# EAGLE board ATmegaProgramming (EAGLE 6.2)
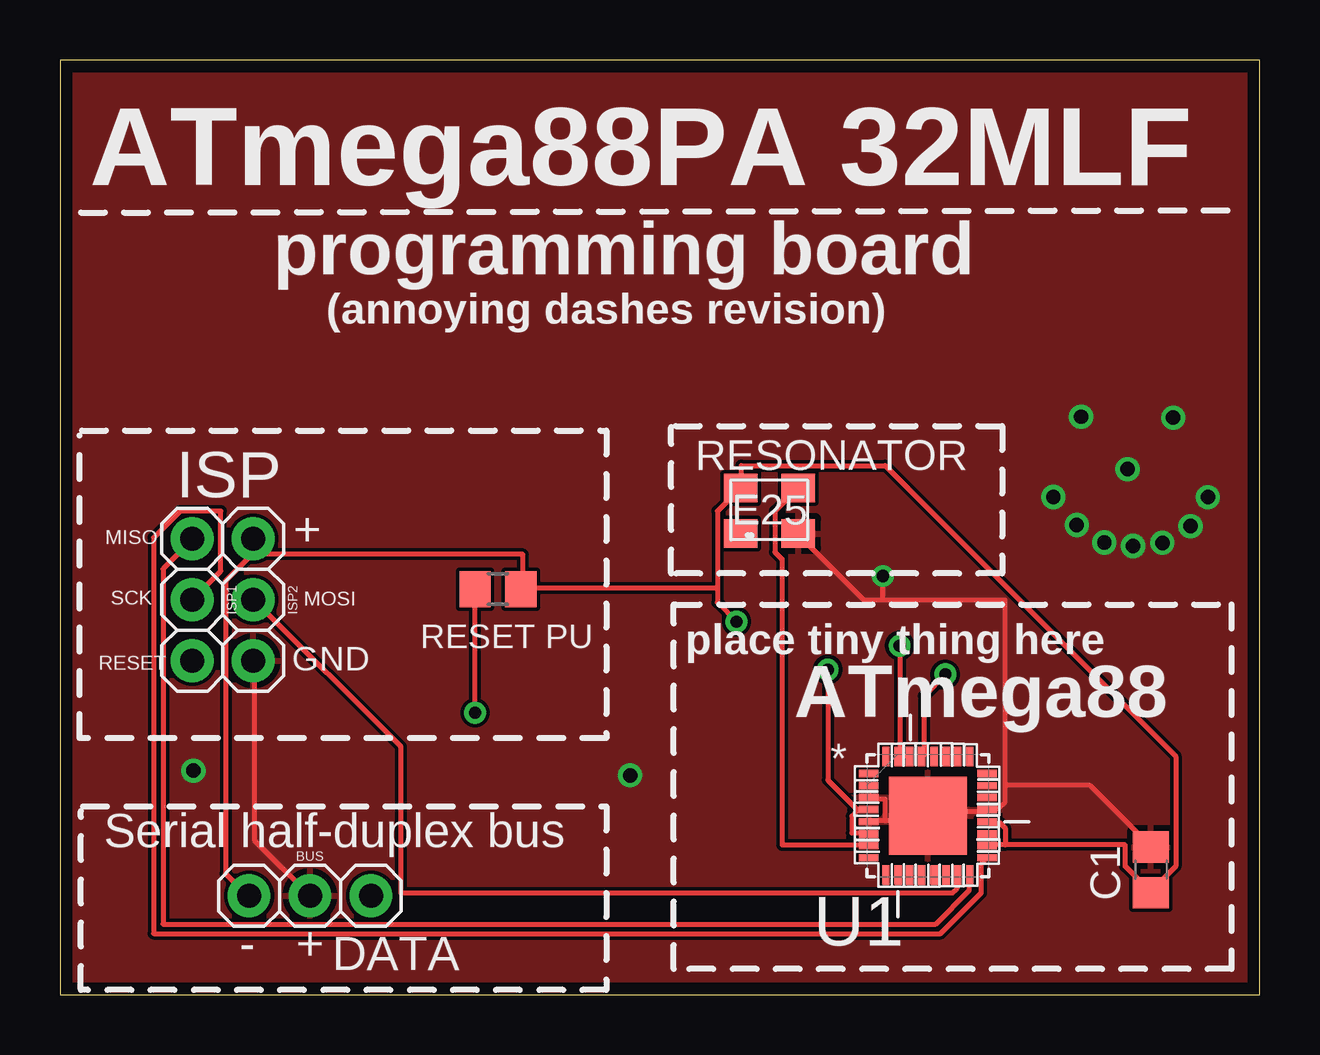
[diagram p0: board, top side]
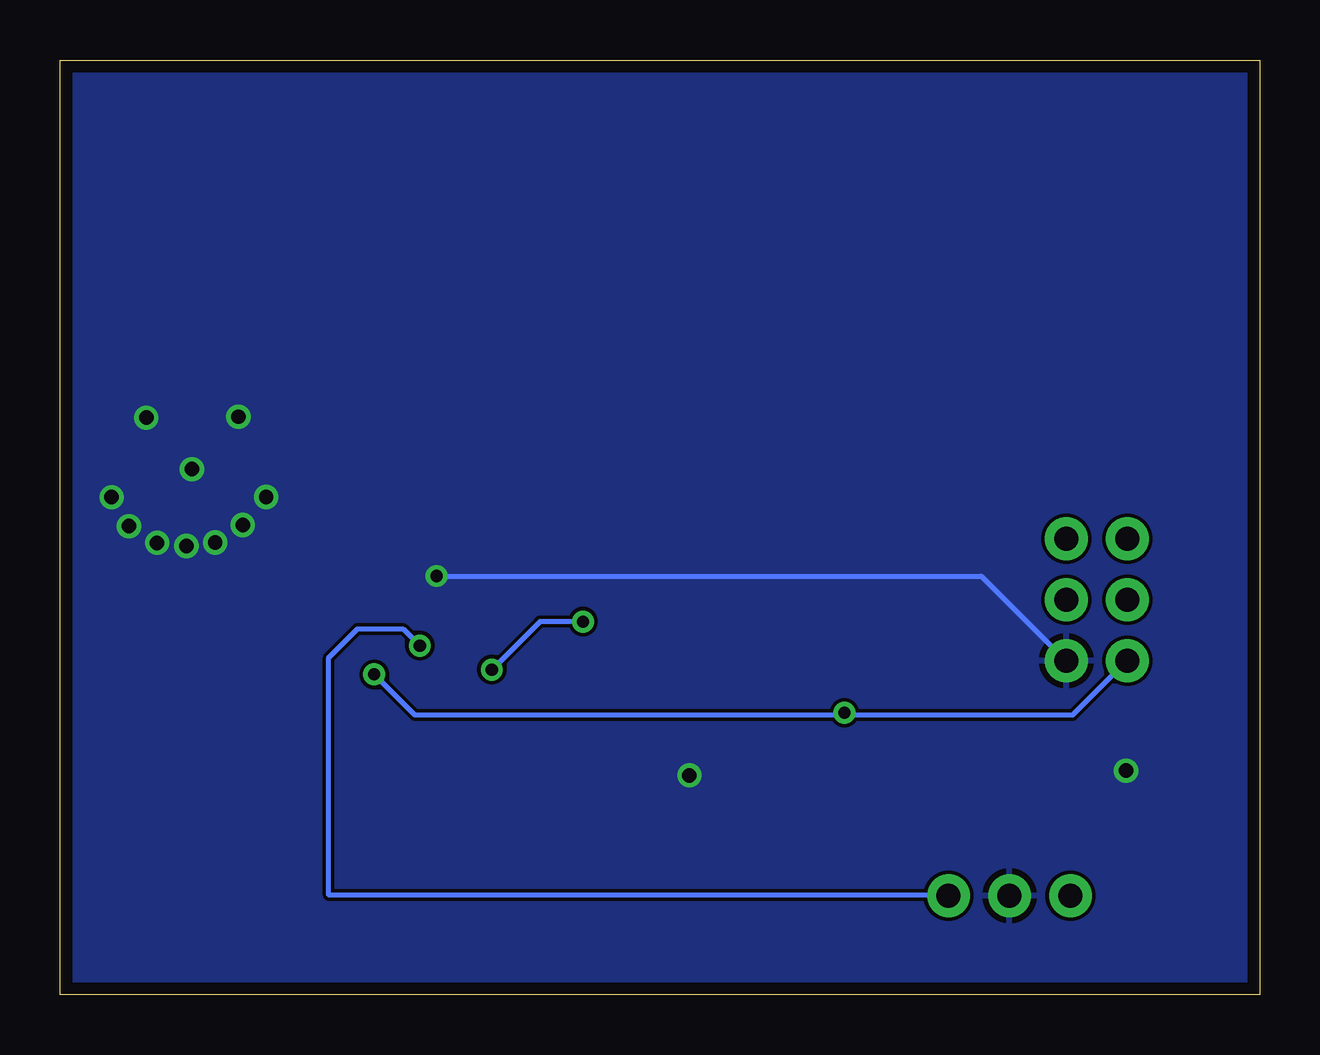
[diagram p1: board, bottom side, seen from below]

Size 50 x 38.94 mm. Coordinates in mm from the lower left corner, seen from the top.
Outline: 0,0 50,0 50,38.94 0,38.94 0,0
Copper layers (1*16): Top 0.035mm / dielectric 1.5mm / Bottom 0.035mm
Design rules: minimum track width 8mil, minimum drill 20mil, track to track 6mil, track to pad 6mil, pad to pad 6mil, via to via 50mil, smd to smd 6mil, copper to edge 20mil, drill to drill 5mil, minimum pad ring 10mil, minimum via ring 8mil, stop-mask expansion 4mil, vias tented up to drill 0mil, thermal gap 10mil

## Footprints (pad centres in the part's own frame; a part is rotated, then mirrored left to right if it is on the bottom)
CONNEC_1X03 = drill 1 pad 1.778: 1 -1.27,1.27; 2 1.27,1.27; 3 3.81,1.27
C0805 = smd 1.3 x 1.5: 1 -0.95,0; 2 0.95,0
R0805 = smd 1.3 x 1.5: 1 -0.95,0; 2 0.95,0
SG-310 = smd 1.4 x 1.2: 1 0,0; 2 2.4,0; 3 2.4,1.9; 4 0,1.9
QFN50P500X500X100-33N = smd 0.813 x 0.305: 1 -2.464,1.753; 2 -2.464,1.245; 3 -2.464,0.762; 4 -2.464,0.254; 5 -2.464,-0.254; 6 -2.464,-0.762; 7 -2.464,-1.245; 8 -2.464,-1.753; 17 2.464,-1.753; 18 2.464,-1.245; 19 2.464,-0.762; 20 2.464,-0.254; 21 2.464,0.254; 22 2.464,0.762; 23 2.464,1.245; 24 2.464,1.753 | smd 0.305 x 0.813: 9 -1.753,-2.464; 10 -1.245,-2.464; 11 -0.762,-2.464; 12 -0.254,-2.464; 13 0.254,-2.464; 14 0.762,-2.464; 15 1.245,-2.464; 16 1.753,-2.464; 25 1.753,2.464; 26 1.245,2.464; 27 0.762,2.464; 28 0.254,2.464; 29 -0.254,2.464; 30 -0.762,2.464; 31 -1.245,2.464; 32 -1.753,2.464 | smd 3.251 x 3.251: 33 0,0

## Placement (x,y rotation side)
BUS  CONNEC_1X03  [CONNEC_1X03]  9.15,2.84 0 top
C1  100nF  [C0805]  45.48,5.2 90 top
ISP1  CONNEC_1X03  [CONNEC_1X03]  4.24,17.72 270 top
ISP2  CONNEC_1X03  [CONNEC_1X03]  6.78,17.72 270 top
R1  [R0805]  18.26,16.89 0 top
RESONATOR  SG-310  [SG-310]  28.38,19.21 0 top
U1  [QFN50P500X500X100-33N]  36.18,7.45 0 top

## Library data of the parts
BUS ISP1 ISP2 RESONATOR = RobotCampus
C1 = rhoban; DATASHEET: condo100nF.pdf; FARNELL_LINK: http://fr.farnell.com/kemet/c0805c104j5ractu/condensateur-100nf-50v-x7r-0805/dp/1414663RL
R1 = rhoban
U1 = RobotCampus; MPN: ATMEGA88PA-MU; OC_FARNELL: 1715491; OC_NEWARK: 15R0272; PACKAGE: QFN-32; SUPPLIER: Atmel

## Nets
CLOCK: RESONATOR.3 U1.7
DATA: BUS.3 U1.30 U1.31
GND: BUS.2 C1.2 ISP2.3 RESONATOR.2 U1.3 U1.5 U1.21 U1.33
MISO: ISP1.1 U1.16
MOSI: ISP2.2 U1.15
MOTORPOS: U1.23
RESET: ISP1.3 R1.1 U1.29
SCK: ISP1.2 U1.17
VCC: BUS.1 C1.1 ISP2.1 R1.2 RESONATOR.4 U1.4 U1.6 U1.18 U1.20

## Tracks (layer width: path | path; a pad name or v marks a point on that pad's centre or on a via)
CLOCK
  Top 0.203: U1.7 33.7,6.24 30.1,6.24 30.1,18.14 29.8,18.44 29.8,20.14 30.7,21.04 RESONATOR.3
DATA  (via drill 0.51)
  Top 0.203: U1.30 35.4,9.94 35,9.94 U1.31 35,10.04 v35,14.54
  Bottom 0.203: v35,14.54 35.7,15.24 37.6,15.24 38.8,14.04 38.8,4.14 13,4.14 BUS.3
GND  (via drill 0.51, 0.6)
  Top 0.203: BUS.2 10.4,4.14 8.1,6.44 8.1,13.84 ISP2.3 | 34.4,7.24 36.1,7.24 36.1,7.44 U1.33 36.2,7.54 36.2,7.64 38.6,7.64 U1.21 38.7,7.74 39.1,7.74 39.4,8.04 39.4,8.74 | 34.4,7.24 33.8,7.24 U1.5 | 34.4,7.24 34.4,8.14 33.8,8.14 U1.3 | 34.3,16.44 39.4,16.44 39.4,8.74 | 34.3,16.44 33.5,16.44 30.8,19.14 RESONATOR.2 | 39.4,8.74 42.9,8.74 45.4,6.24 C1.2 | 34.3,16.44 v34.3,17.44
  Bottom 0.203: v34.3,17.44 11.6,17.44 8.1,13.94 ISP2.3
  other vias: 41.41,20.73 42.38,19.57 43.53,18.84 44.73,18.69 45.95,18.82 47.13,19.52 47.85,20.72 46.4,24.04 44.5,21.89 42.56,24.07 23.77,9.13 5.56,9.33
  pour Top: 0.07,38.76 49.82,38.76 49.82,0.42 0.14,0.42 0.14,35.98
  pour Bottom: 0.12,38.79 49.91,38.79 49.91,0.42 0.12,0.42 0.12,36.82
MISO
  Top 0.203: U1.16 37.9,4.94 37.9,4.34 36.5,2.94 4.3,2.94 4.3,17.74 5.5,18.94 ISP1.1
MOSI
  Top 0.203: U1.15 37.4,4.94 37.4,4.44 37.2,4.24 14.2,4.24 14.2,10.34 8.1,16.44 ISP2.2
RESET  (via drill 0.51)
  Top 0.203: v36.9,13.34 36,12.44 36,9.94 U1.29 | v17.3,11.74 17.3,16.84 R1.1
  Bottom 0.203: v36.9,13.34 35.2,11.64 17.3,11.64 | 17.3,11.64 7.8,11.64 5.6,13.84 ISP1.3 | v17.3,11.74 17.3,11.64
SCK
  Top 0.203: U1.17 38.6,5.64 38.4,5.44 38.4,4.24 36.7,2.54 3.9,2.54 3.9,19.04 5,20.14 6.7,20.14 6.7,17.64 5.6,16.54 ISP1.2
VCC  (via drill 0.51)
  Top 0.203: BUS.1 7.8,4.14 6.9,5.04 6.9,17.24 8,18.34 8,18.94 ISP2.1 8.1,18.34 19.3,18.34 19.3,17.04 R1.2 19.3,16.94 27.4,16.94 | 39.4,6.24 38.7,6.24 U1.18 | 39.4,6.24 39.4,6.94 39.2,7.14 38.7,7.14 U1.20 | 39.4,6.24 44.4,6.24 44.4,5.34 45.4,4.34 C1.1 45.5,4.34 46.5,5.34 46.5,9.94 34.4,22.04 28.4,22.04 28.4,21.14 RESONATOR.4 28.3,21.04 27.4,20.14 27.4,16.94 | 33.2,7.64 33,7.44 33,6.74 33.7,6.74 U1.6 | 33.2,7.64 33.7,7.64 U1.4 | v32,13.54 32,8.94 33.2,7.74 33.2,7.64 | v28.2,15.54 27.4,16.34 27.4,16.94
  Bottom 0.203: v32,13.54 30,15.54 v28.2,15.54

## Text on the board
tPlace: ATmega88PA 32MLF | programming board | (annoying dashes revision) | ISP | MISO | + | SCK | MOSI | RESET | GND | RESET PU | place tiny thing here | ATmega88 | Serial half-duplex bus | - | + | DATA